# EAGLE board door bell (EAGLE 9.3.0)
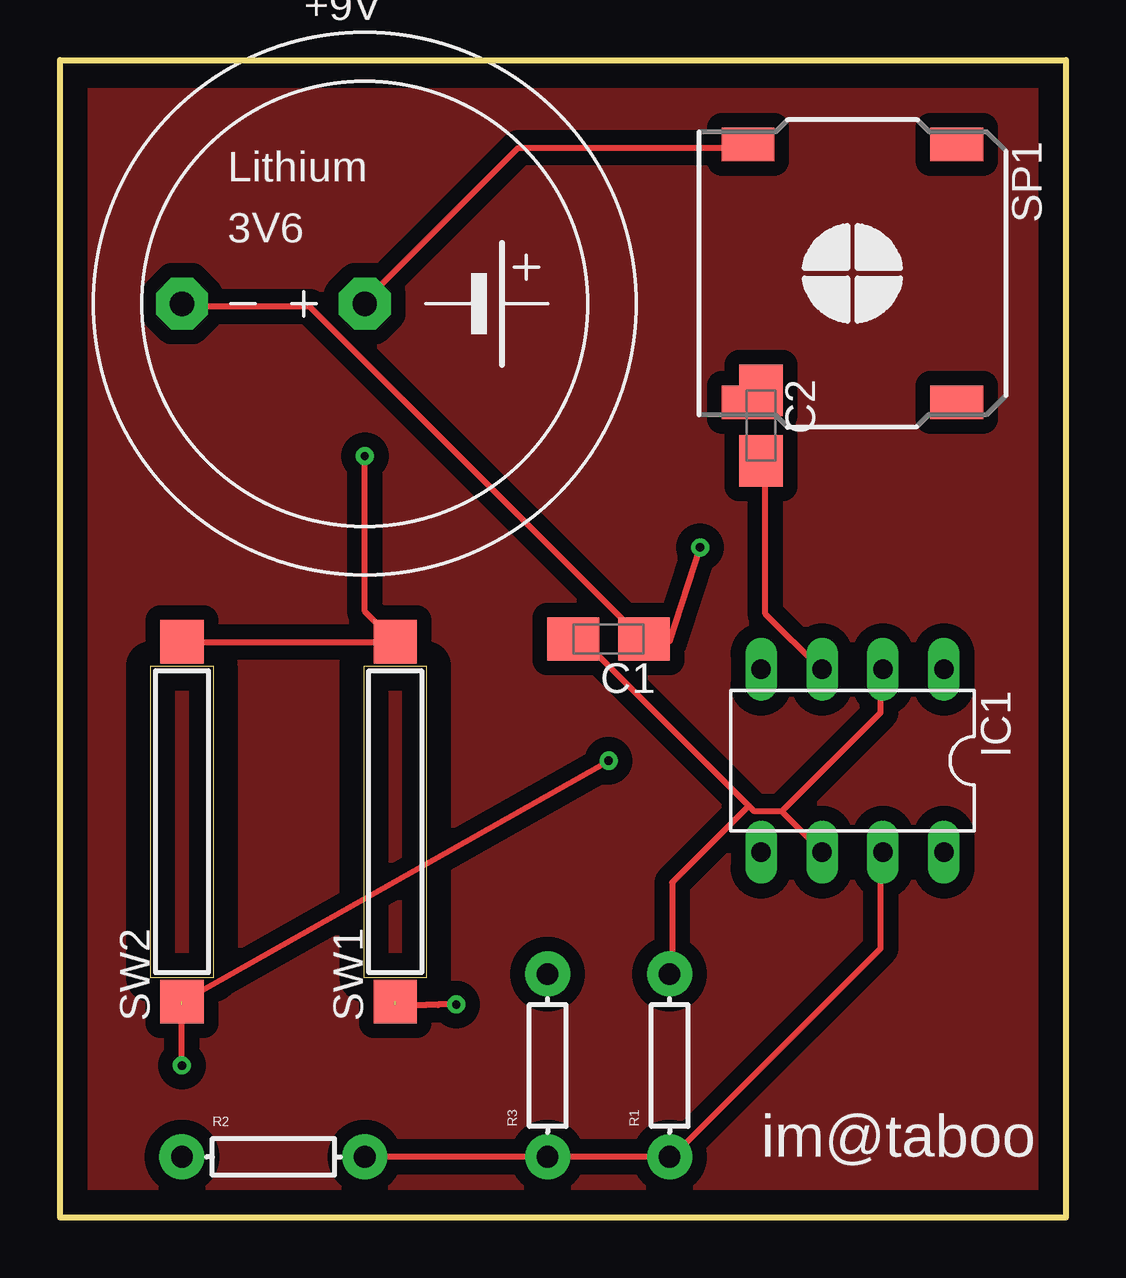
[diagram p0: board, top side]
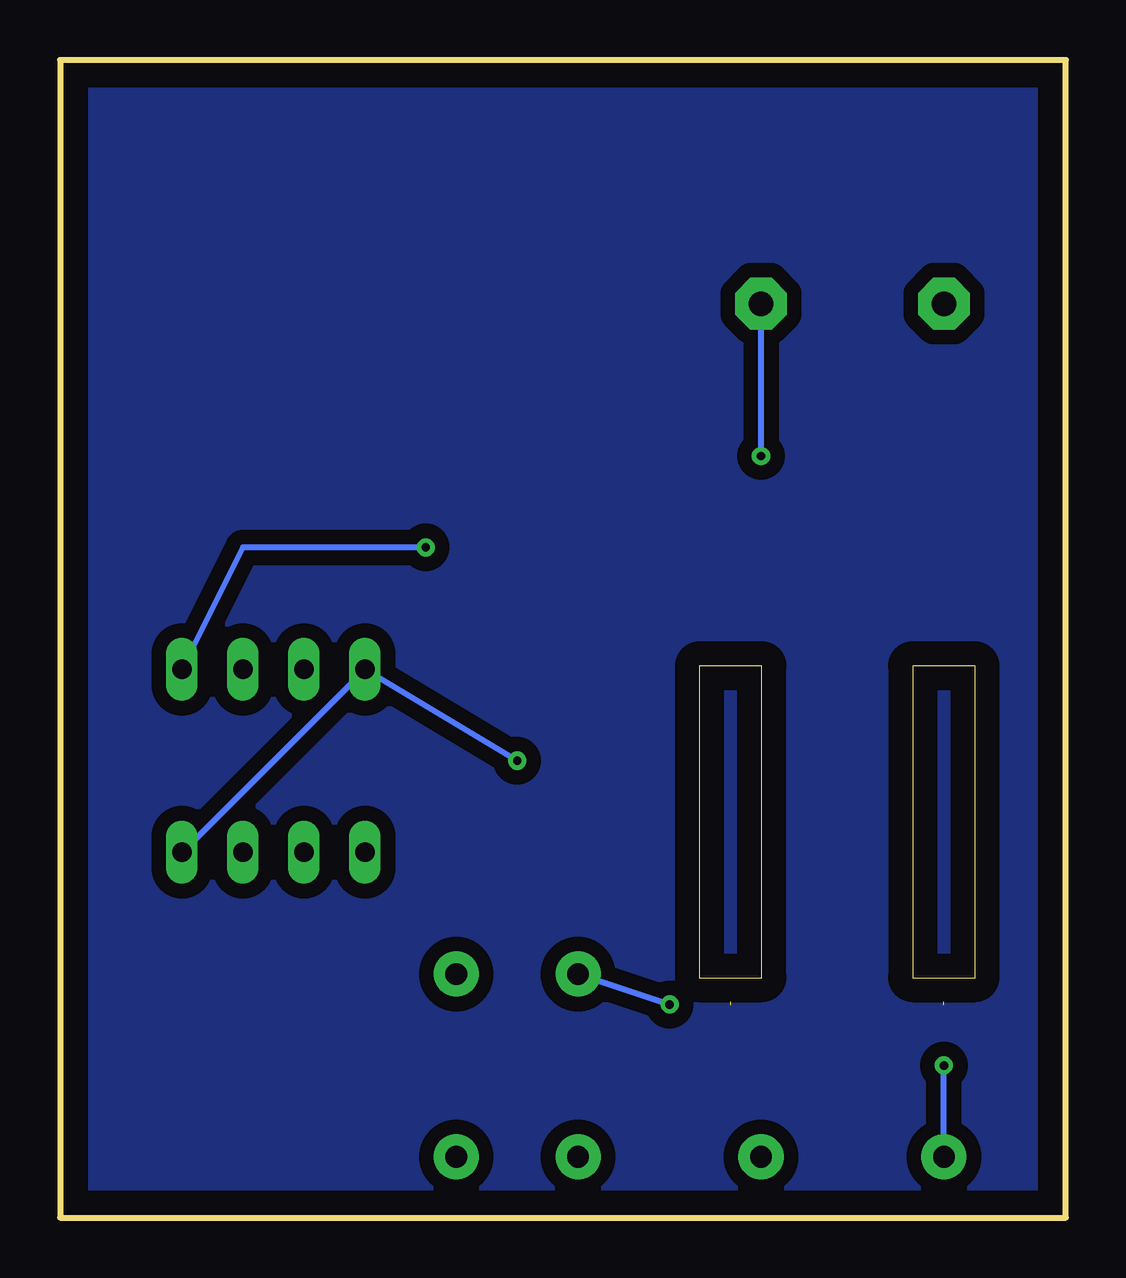
[diagram p1: board, bottom side, seen from below]

Size 41.91 x 48.26 mm. Coordinates in mm from the lower left corner, seen from the top.
Outline: 0,48.26 41.91,48.26 41.91,0 0,0 0,48.26
Copper layers (1*16): Top 0.035mm / dielectric 1.5mm / Bottom 0.035mm
Design rules "default *": minimum track width 10mil, minimum drill 0.35mm, track to track 8mil, track to pad 6mil, pad to pad 6mil, via to via 6mil, smd to smd 6mil, copper to edge 40mil, drill to drill 6mil, minimum pad ring 10mil, minimum via ring 8mil, stop-mask expansion 4mil, vias tented up to drill 0mil, thermal gap 10mil

## Footprints (pad centres in the part's own frame; a part is rotated, then mirrored left to right if it is on the bottom)
SL-340/P3.6V = drill 1.016 pad 2.159 octagon: + 0,0; - -7.62,0
A/3216-18W = smd 2.15 x 1.8: + 1.475,0; - -1.475,0
DIL-08 = drill 0.813 long: 1 -3.81,-3.81; 2 -1.27,-3.81; 3 1.27,-3.81; 4 3.81,-3.81; 5 3.81,3.81; 6 1.27,3.81; 7 -1.27,3.81; 8 -3.81,3.81
AXIAL-0.3 = drill 0.9 pad 1.88: P$1 -3.81,0; P$2 3.81,0
SMS-1308MS-2-R = smd 1.4 x 2.2: + -5.375,-4.35; - 5.375,-4.35; M1 -5.375,4.35; M2 5.375,4.35
CT10-XXXX-A2 = smd 1.8 x 1.8: 1 -7.5,0; 2 7.5,0

## Placement (x,y rotation side)
+9V  SL340P  [SL-340/P3.6V]  12.7,38.1 0 top
C1  [A/3216-18W]  22.86,24.13 180 top
C2  [A/3216-18W]  29.21,33.02 270 top
IC1  NE555P  [DIL-08]  33.02,19.05 180 top
R1  [AXIAL-0.3]  25.4,6.35 90 top
R2  [AXIAL-0.3]  8.89,2.54 0 top
R3  [AXIAL-0.3]  20.32,6.35 90 top
SP1  SMS-1308MS-2-R  [SMS-1308MS-2-R]  33.02,39.37 270 top
SW1  CT10-XXXX-A2  [CT10-XXXX-A2]  13.97,16.51 90 top
SW2  CT10-XXXX-A2  [CT10-XXXX-A2]  5.08,16.51 90 top

## Library data of the parts
+9V = battery
C1 C2 = rcl
IC1 = SparkFun-AnalogIC; MF: Arrow Electronics; MPN: NE555N; OC_FARNELL: 1467742; OC_NEWARK: 89K1486
R1-R3 = SparkFun-Passives
SP1 = speaker
SW1 SW2 = switch-coto

## Nets
N$1: C2.+ IC1.3
N$2: C2.- SP1.-
N$3: C1.+ IC1.2 IC1.6 R1.P$2
N$4: +9V.- C1.- IC1.1
N$5: R3.P$2 SW1.1
N$6: IC1.4 IC1.8 R2.P$1 SW2.1
N$8: IC1.7 R1.P$1 R2.P$2 R3.P$1
N$9: +9V.+ SP1.+ SW1.2 SW2.2

## Tracks (layer width: path | path; a pad name or v marks a point on that pad's centre or on a via)
GND
  pour Bottom (isolate 0.61): 0,48.26 0,0 41.91,0 41.91,48.26
  pour Top (isolate 0.61): 0,48.26 0,0 41.91,0 41.91,48.26
N$1
  Top 0.254: C2.+ 29.39,31.34 29.39,25.17 31.67,22.88 IC1.3
N$2
  Top 0.254: C2.- 29.16,34.32 28.7,33.86 SP1.-
N$3
  Top 0.254: 28.7,17.17 28.93,16.94 30.07,16.94 | 28.7,17.17 21.84,24.03 21.39,24.03 C1.+ | 30.07,16.94 31.67,15.34 IC1.6 | 30.07,16.94 34.19,21.06 34.19,22.66 IC1.2 | 28.7,17.17 25.5,13.97 25.5,10.31 R1.P$2
N$4  (via drill 0.35)
  Top 0.254: 36.7,22.88 IC1.1 | +9V.- 5.16,37.97 10.41,37.97 24.13,24.26 C1.- 24.36,24.03 25.4,24.03 v26.67,27.94
  Bottom 0.254: v26.67,27.94 34.29,27.94 IC1.1
N$5  (via drill 0.35)  (1 unrouted)
  Top 0.254: v16.51,8.89 15.77,8.89 15.74,8.87 15.24,8.87 13.97,8.87
  Bottom 0.254: R3.P$2 v16.51,8.89
N$6  (via drill 0.35)  (1 unrouted)
  Top 0.254: v5.08,6.35 5.08,8.87 | SW2.1 v22.86,19.05
  Bottom 0.254: 29.62,22.43 36.7,15.34 IC1.8 | 29.62,22.43 29.39,22.66 IC1.4 | 29.62,22.43 IC1.4 | R2.P$1 v5.08,6.35 | v22.86,19.05 IC1.4
N$8
  Top 0.254: R2.P$2 R3.P$1 R1.P$1 25.5,2.54 34.19,11.23 34.19,15.11 IC1.7
N$9  (via drill 0.35)
  Top 0.254: SP1.+ 28.47,44.6 19.1,44.6 12.7,38.2 +9V.+ | SW2.2 SW1.2 12.7,25.28 v12.7,31.75
  Bottom 0.254: v12.7,31.75 +9V.+

## Text on the board
tPlace: im@taboo